# EAGLE board dbt_shield_v2_v30 (EAGLE 9.7.0)
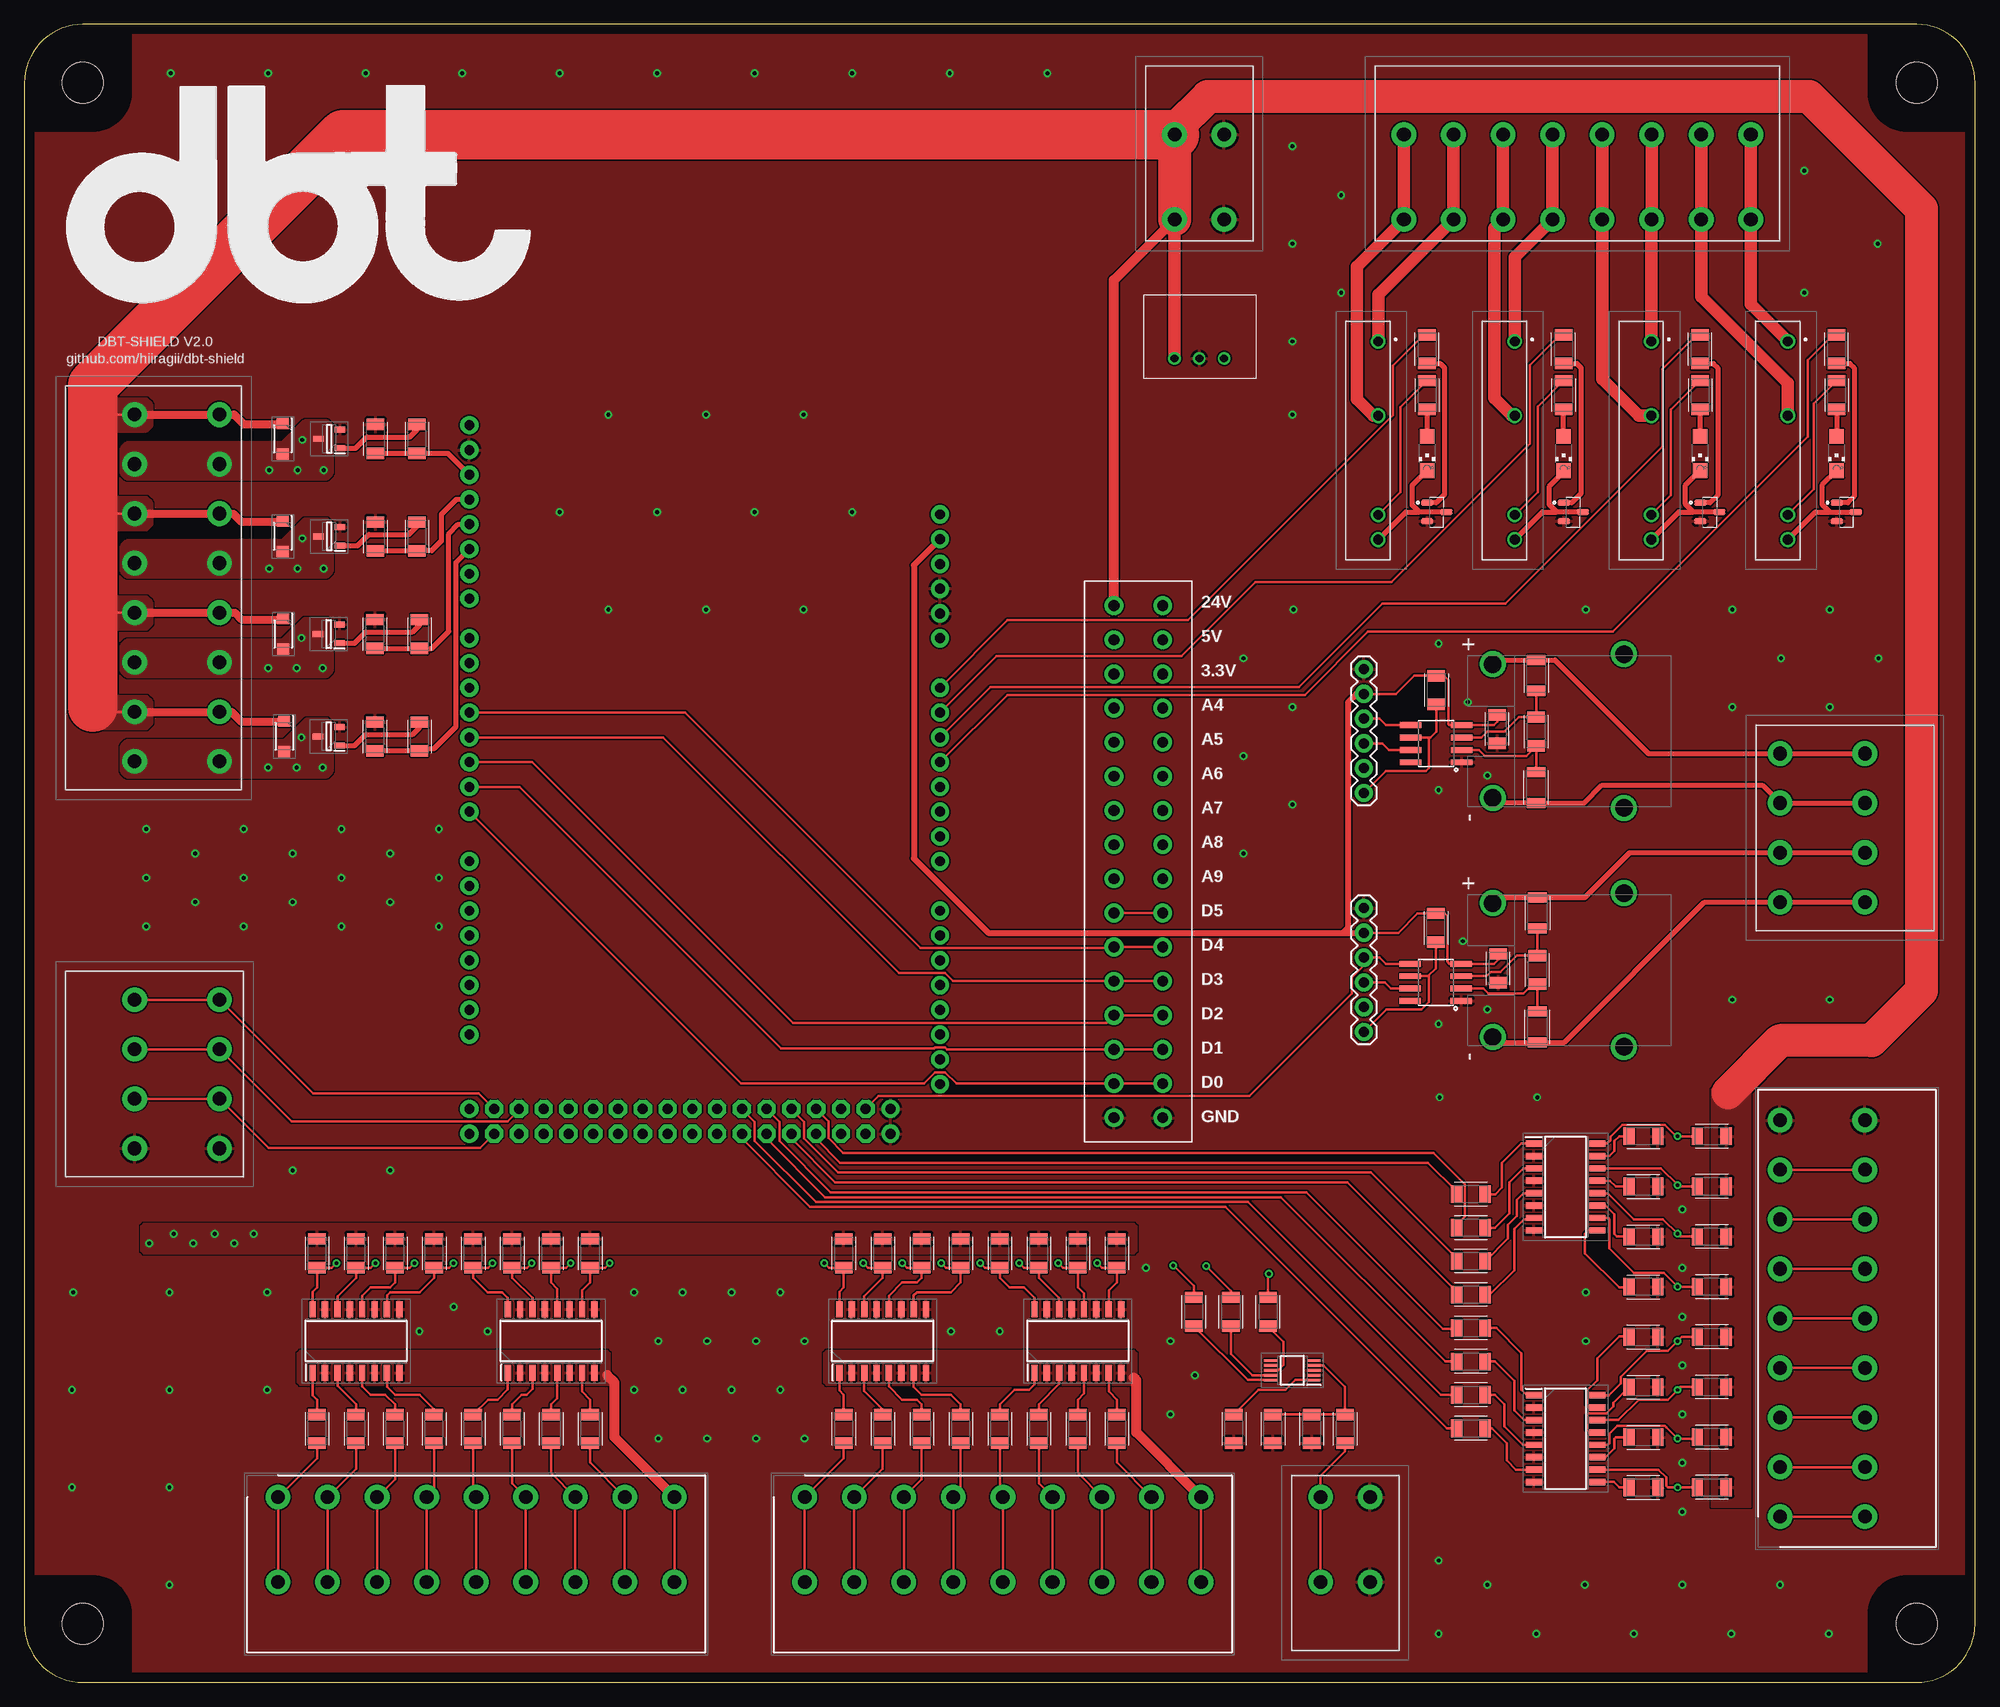
[diagram p0: board, top side]
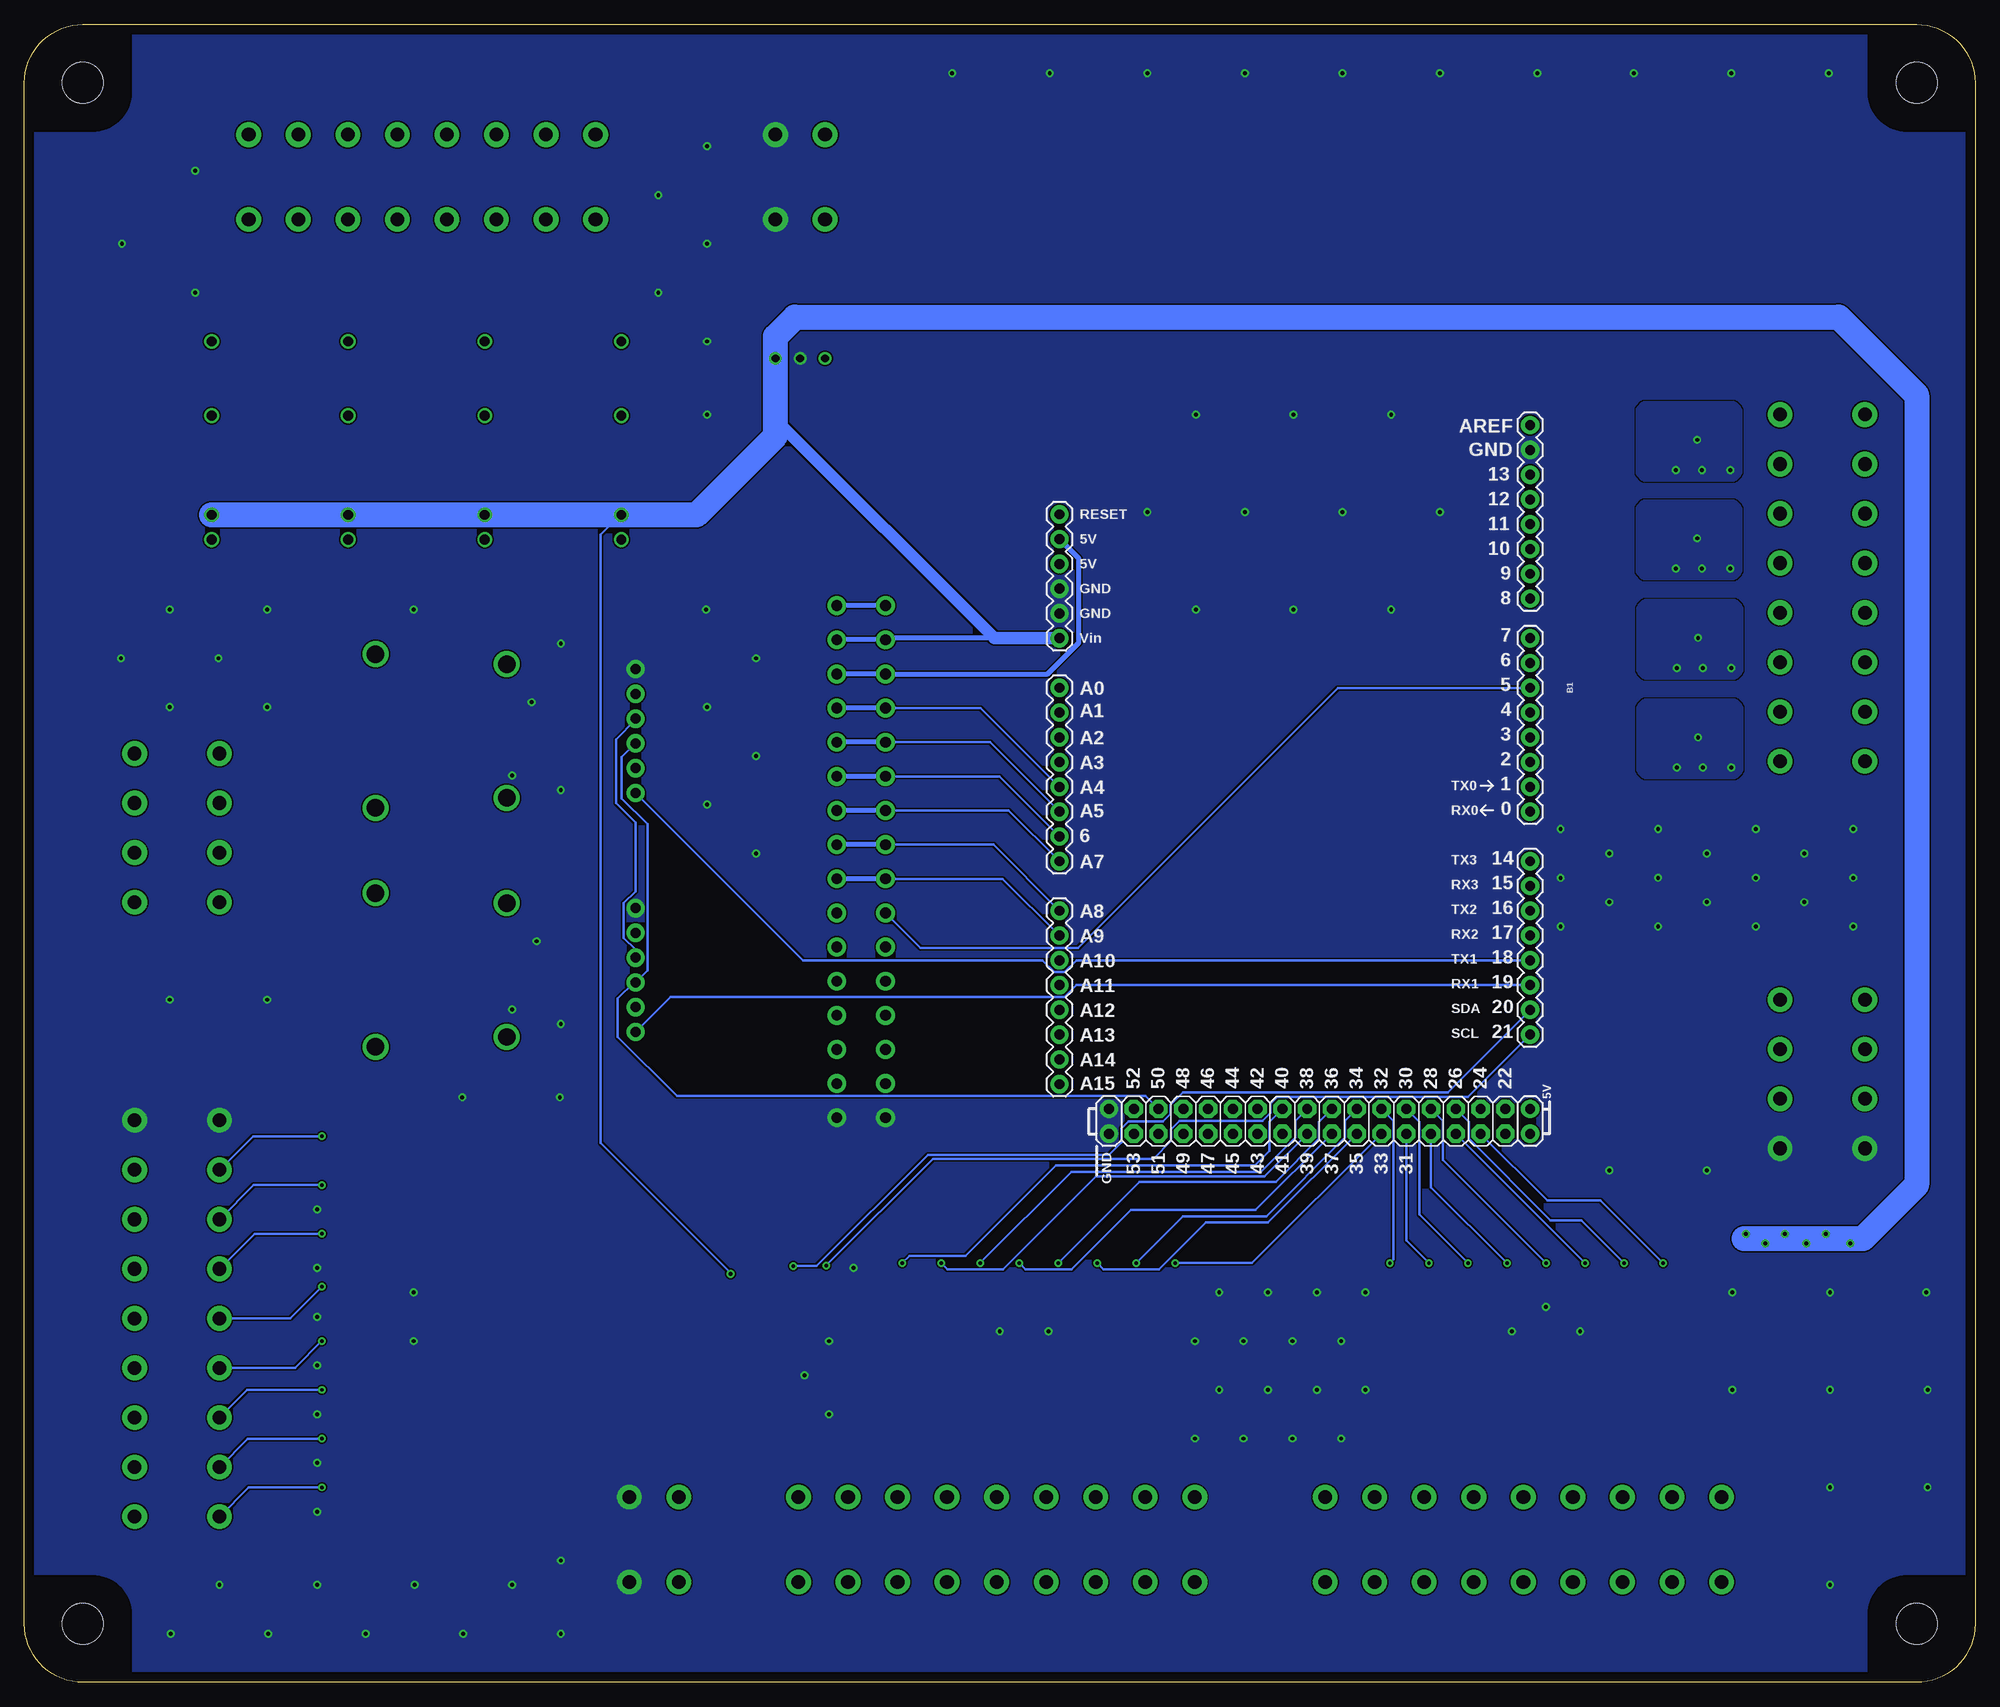
[diagram p1: board, bottom side, seen from below]

Size 200 x 170 mm. Coordinates in mm from the lower left corner, seen from the top.
Outline: 0,164 0,6 arc90 6,0 194,0 arc90 200,6 200,164 arc90 194,170 6,170 arc90 0,164
Copper layers (1*16): Top 0.035mm / dielectric 1.5mm / Bottom 0.035mm
Design rules "default": minimum track width 6mil, minimum drill 0.35mm, track to track 6mil, track to pad 6mil, pad to pad 6mil, via to via 6mil, smd to smd 6mil, copper to edge 40mil, drill to drill 6mil, minimum pad ring 10mil, minimum via ring 8mil, stop-mask expansion 4mil, vias tented up to drill 0mil, thermal gap 10mil
Holes 4.2 mm at 6,164 194,164 194,6 6,6
tRestrict: area -5,159 to 11,175; area 189,159 to 205,175; area -5,-5 to 11,11; area 189,-5 to 205,11
bRestrict: area -5,159 to 11,175; area 189,159 to 205,175; area -5,-5 to 11,11; area 189,-5 to 205,11

## Footprints (pad centres in the part's own frame; a part is rotated, then mirrored left to right if it is on the bottom)
ARDUINO_MEGA = drill 1.016 pad 1.88: 0 13.97,24.13; 1 11.43,24.13; 2 8.89,24.13; 3 6.35,24.13; 3.3V -13.97,-24.13; 4 3.81,24.13; 5 1.27,24.13; 5V@0 -11.43,-24.13; 5V@1 44.45,24.13; 5V@2 46.99,24.13; 6 -1.27,24.13; 7 -3.81,24.13; 8 -7.874,24.13; 9 -10.414,24.13; 10 -12.954,24.13; 11 -15.494,24.13; 12 -18.034,24.13; 13 -20.574,24.13; 14 19.05,24.13; 15 21.59,24.13; 16 24.13,24.13; 17 26.67,24.13; 18 29.21,24.13; 19 31.75,24.13; 20 34.29,24.13; 21 36.83,24.13; A0 1.27,-24.13; A1 3.81,-24.13; A2 6.35,-24.13; A3 8.89,-24.13; A4 11.43,-24.13; A5 13.97,-24.13; A6 16.51,-24.13; A7 19.05,-24.13; A8 24.13,-24.13; A9 26.67,-24.13; A10 29.21,-24.13; A11 31.75,-24.13; A12 34.29,-24.13; A13 36.83,-24.13; A14 39.37,-24.13; A15 41.91,-24.13; AREF -25.654,24.13; GND@0 -8.89,-24.13; GND@1 -6.35,-24.13; GND@2 44.45,-19.05; GND@3 46.99,-19.05; GND@4 -23.114,24.13; RESET -16.51,-24.13; VIN -3.81,-24.13 | drill 1.016 pad 1.88 octagon: 22 44.45,21.59; 23 46.99,21.59; 24 44.45,19.05; 25 46.99,19.05; 26 44.45,16.51; 27 46.99,16.51; 28 44.45,13.97; 29 46.99,13.97; 30 44.45,11.43; 31 46.99,11.43; 32 44.45,8.89; 33 46.99,8.89; 34 44.45,6.35; 35 46.99,6.35; 36 44.45,3.81; 37 46.99,3.81; 38 44.45,1.27; 39 46.99,1.27; 40 44.45,-1.27; 41 46.99,-1.27; 42 44.45,-3.81; 43 46.99,-3.81; 44 44.45,-6.35; 45 46.99,-6.35; 46 44.45,-8.89; 47 46.99,-8.89; 48 44.45,-11.43; 49 46.99,-11.43; 50 44.45,-13.97; 51 46.99,-13.97; 52 44.45,-16.51; 53 46.99,-16.51
CAPC3216X135 = smd 1.165 x 1.815: 1 -1.475,0; 2 1.475,0
SODFL3618X143N = smd 1.12 x 1.22: 1 -1.55,0; 2 1.55,0
SOIC127P700X230-16N = smd 1.65 x 0.65: 1 -3.25,4.445; 2 -3.25,3.175; 3 -3.25,1.905; 4 -3.25,0.635; 5 -3.25,-0.635; 6 -3.25,-1.905; 7 -3.25,-3.175; 8 -3.25,-4.445; 9 3.25,-4.445; 10 3.25,-3.175; 11 3.25,-1.905; 12 3.25,-0.635; 13 3.25,0.635; 14 3.25,1.905; 15 3.25,3.175; 16 3.25,4.445
SOP50P490X110-10N = smd 1.4 x 0.3: 1 -2.2,1; 2 -2.2,0.5; 3 -2.2,0; 4 -2.2,-0.5; 5 -2.2,-1; 6 2.2,-1; 7 2.2,-0.5; 8 2.2,0; 9 2.2,0.5; 10 2.2,1
1017503 = drill 1.4 pad 2.54: 1 0,0; 2 0,-8.7; 3 5.08,0; 4 5.08,-8.7
1017505 = drill 1.4 pad 2.54: 1 0,0; 2 0,-8.7; 3 5.08,0; 4 5.08,-8.7; 5 10.16,0; 6 10.16,-8.7; 7 15.24,0; 8 15.24,-8.7
1017509 = drill 1.4 pad 2.54: 1 0,0; 2 0,-8.7; 3 5.08,0; 4 5.08,-8.7; 5 10.16,0; 6 10.16,-8.7; 7 15.24,0; 8 15.24,-8.7; 9 20.32,0; 10 20.32,-8.7; 11 25.4,0; 12 25.4,-8.7; 13 30.48,0; 14 30.48,-8.7; 15 35.56,0; 16 35.56,-8.7
SHDR18W120P870X508_2X9_4652X18 = drill 1.4 pad 2.54: 1 0,0; 2 0,-8.7; 3 5.08,0; 4 5.08,-8.7; 5 10.16,0; 6 10.16,-8.7; 7 15.24,0; 8 15.24,-8.7; 9 20.32,0; 10 20.32,-8.7; 11 25.4,0; 12 25.4,-8.7; 13 30.48,0; 14 30.48,-8.7; 15 35.56,0; 16 35.56,-8.7; 17 40.64,0; 18 40.64,-8.7
1X06 = drill 1.016 pad 1.88: 1 0,0; 2 2.54,0; 3 5.08,0; 4 7.62,0; 5 10.16,0; 6 12.7,0
PCC-SMP = drill 1.778: + 6.858,0; - -6.858,0; CLIP1 -7.874,-13.462; CLIP2 7.874,-13.462
G3MC202PLDC5 = drill 1 pad 1.5: 1 0,0; 2 -7.62,0; 3 -17.78,0; 4 -20.32,0
INDC3216X190 = smd 1.043 x 1.91: 1 -1.584,0; 2 1.584,0
CHIPLED_1206 = smd 1.5 x 1.5: A 0,-1.75; C 0,1.75
SOT95P230X110-3N = smd 1.05 x 0.6: 1 -1.1,0.95; 2 -1.1,-0.95; 3 1.1,0
SOT95P230X110-3N1 = smd 1.26 x 0.61: B -0.98,0.95; C 0.98,0; E -0.98,-0.95
RESC3216X70 = smd 1.165 x 1.815: 1 -1.475,0; 2 1.475,0
DC-DC_CONVERTER_78XX = drill 0.8: GND 0,0; VIN -2.54,0; VOUT 2.54,0
SOIC8 = smd 0.61 x 2.21: 1 -1.905,-2.616; 2 -0.635,-2.616; 3 0.635,-2.616; 4 1.905,-2.616; 5 1.905,2.616; 6 0.635,2.616; 7 -0.635,2.616; 8 -1.905,2.616
1861991 = drill 1.1 pad 1.93: P$1 0,0; P$2 3.5,0; P$3 7,0; P$4 10.5,0; P$5 14,0; P$6 17.5,0; P$7 21,0; P$8 24.5,0; P$9 28,0; P$10 31.5,0; P$11 35,0; P$12 38.5,0; P$13 42,0; P$14 45.5,0; P$15 49,0; P$16 52.5,0; P$17 0,5; P$18 3.5,5; P$19 7,5; P$20 10.5,5; P$21 14,5; P$22 17.5,5; P$23 21,5; P$24 24.5,5; P$25 28,5; P$26 31.5,5; P$27 35,5; P$28 38.5,5; P$29 42,5; P$30 45.5,5; P$31 49,5; P$32 52.5,5

## Placement (x,y rotation side)
B1  ARDUINO_MEGA_R3FULL  [ARDUINO_MEGA]  69.75,103.25 270 bottom
C1  0.1uF  [CAPC3216X135]  151.1,73.21 270 top
C2  10 nF  [CAPC3216X135]  155.12,73.05 270 top
C3  0.1uF  [CAPC3216X135]  151,97.75 270 top
C4  10 nF  [CAPC3216X135]  155,97.5 270 top
C5  0.1uF  [CAPC3216X135]  127.5,38 270 top
C6  100pF  [CAPC3216X135]  132,26 270 top
D1  ES1ALHR3  [SODFL3618X143N]  26.5,127.5 270 top
D2  ES1ALHR3  [SODFL3618X143N]  26.5,117.5 270 top
D3  ES1ALHR3  [SODFL3618X143N]  26.55,107.5 270 top
D4  ES1ALHR3  [SODFL3618X143N]  26.65,97 270 top
IC1  TLP292-4_V4-LA,E  [SOIC127P700X230-16N]  34,35 90 top
IC2  TLP292-4_V4-LA,E  [SOIC127P700X230-16N]  54,35 90 top
IC3  TLP292-4_V4-LA,E  [SOIC127P700X230-16N]  88,35 90 top
IC4  TLP292-4_V4-LA,E  [SOIC127P700X230-16N]  108,35 90 top
IC5  TLP292-4_V4-LA,E  [SOIC127P700X230-16N]  158,25 0 top
IC6  TLP292-4_V4-LA,E  [SOIC127P700X230-16N]  158,50.8 0 top
IC7  ADS1015BQDGSRQ1  [SOP50P490X110-10N]  130,32 180 top
J1  1017503  [1017503]  123,150 180 top
J2  1017505  [1017505]  20,70 270 top
J3  1017509  [1017509]  20,130 270 top
J4  1017509  [1017509]  177,150 180 top
J5  1017505  [1017505]  180,80 90 top
J6  1017510  [SHDR18W120P870X508_2X9_4652X18]  26,19 0 top
J7  1017510  [SHDR18W120P870X508_2X9_4652X18]  80,19 0 top
J8  1017510  [SHDR18W120P870X508_2X9_4652X18]  180,17 90 top
J9  1017503  [1017503]  132.89,19 0 top
JP1  DNP  [1X06]  137.34,79.4 270 top
JP2  PCB_THERMOCOUPLE  [PCC-SMP]  150.55,73.05 90 top
JP3  DNP  [1X06]  137.34,103.9 270 top
JP4  PCB_THERMOCOUPLE  [PCC-SMP]  150.55,97.55 90 top
K1  G3MC-202PL-DC5  [G3MC202PLDC5]  180.8,137.5 90 top
K2  G3MC-202PL-DC5  [G3MC202PLDC5]  166.8,137.5 90 top
K3  G3MC-202PL-DC5  [G3MC202PLDC5]  152.8,137.5 90 top
K4  G3MC-202PL-DC5  [G3MC202PLDC5]  138.8,137.5 90 top
L1  470 OHM  [INDC3216X190]  155.12,67.2 270 top
L2  470 OHM  [INDC3216X190]  155.12,78.89 90 top
L3  470 OHM  [INDC3216X190]  155,91.75 270 top
L4  470 OHM  [INDC3216X190]  155,103.25 90 top
LED1  [CHIPLED_1206]  185.8,126 180 top
LED2  [CHIPLED_1206]  171.8,126 180 top
LED3  [CHIPLED_1206]  157.8,126 180 top
LED4  [CHIPLED_1206]  143.8,126 180 top
Q1  PMV40UN2R  [SOT95P230X110-3N]  31.25,127.5 180 top
Q2  PMV40UN2R  [SOT95P230X110-3N]  31.25,117.5 180 top
Q3  PMV40UN2R  [SOT95P230X110-3N]  31.2,107.5 180 top
Q4  PMV40UN2R  [SOT95P230X110-3N]  31.2,97 180 top
Q5  MMBT3904-7-F  [SOT95P230X110-3N1]  186.8,120 0 top
Q6  MMBT3904-7-F  [SOT95P230X110-3N1]  172.8,120 0 top
Q7  MMBT3904-7-F  [SOT95P230X110-3N1]  158.8,120 0 top
Q8  MMBT3904-7-F  [SOT95P230X110-3N1]  144.8,120 0 top
R1  6.8k  [RESC3216X70]  30,26 90 top
R2  6.8k  [RESC3216X70]  34,26 90 top
R3  6.8k  [RESC3216X70]  38,26 90 top
R4  6.8k  [RESC3216X70]  42,26 90 top
R5  10k  [RESC3216X70]  30,44 90 top
R6  10k  [RESC3216X70]  34,44 90 top
R7  10k  [RESC3216X70]  38,44 90 top
R8  10k  [RESC3216X70]  42,44 90 top
R9  6.8k  [RESC3216X70]  46,26 90 top
R10  6.8k  [RESC3216X70]  50,26 90 top
R11  6.8k  [RESC3216X70]  54,26 90 top
R12  6.8k  [RESC3216X70]  58,26 90 top
R13  10k  [RESC3216X70]  46,44 90 top
R14  10k  [RESC3216X70]  50,44 90 top
R15  10k  [RESC3216X70]  54,44 90 top
R16  10k  [RESC3216X70]  58,44 90 top
R17  6.8k  [RESC3216X70]  84,26 90 top
R18  6.8k  [RESC3216X70]  88,26 90 top
R19  6.8k  [RESC3216X70]  92,26 90 top
R20  6.8k  [RESC3216X70]  96,26 90 top
R21  10k  [RESC3216X70]  84,44 90 top
R22  10k  [RESC3216X70]  88,44 90 top
R23  10k  [RESC3216X70]  92,44 90 top
R24  10k  [RESC3216X70]  96,44 90 top
R25  6.8k  [RESC3216X70]  100,26 90 top
R26  6.8k  [RESC3216X70]  104,26 90 top
R27  6.8k  [RESC3216X70]  108,26 90 top
R28  6.8k  [RESC3216X70]  112,26 90 top
R29  10k  [RESC3216X70]  100,44 90 top
R30  10k  [RESC3216X70]  104,44 90 top
R31  10k  [RESC3216X70]  108,44 90 top
R32  10k  [RESC3216X70]  112,44 90 top
R33  250R  [RESC3216X70]  148.3,36.34 0 top
R34  250R  [RESC3216X70]  148.3,32.91 0 top
R35  250R  [RESC3216X70]  148.3,29.48 0 top
R36  250R  [RESC3216X70]  148.3,26.05 0 top
R37  10k  [RESC3216X70]  173,35.43 0 top
R38  10k  [RESC3216X70]  173,30.29 0 top
R39  10k  [RESC3216X70]  173,25.14 0 top
R40  10k  [RESC3216X70]  173,20 0 top
R41  250R  [RESC3216X70]  148.3,50.05 0 top
R42  250R  [RESC3216X70]  148.3,46.62 0 top
R43  250R  [RESC3216X70]  148.3,43.19 0 top
R44  250R  [RESC3216X70]  148.3,39.76 0 top
R45  10k  [RESC3216X70]  173,56 0 top
R46  10k  [RESC3216X70]  173,50.86 0 top
R47  10k  [RESC3216X70]  173,45.71 0 top
R48  10k  [RESC3216X70]  173,40.57 0 top
R49  10k  [RESC3216X70]  166,35.43 180 top
R50  10k  [RESC3216X70]  166,30.29 180 top
R51  10k  [RESC3216X70]  166,25.14 180 top
R52  10k  [RESC3216X70]  166,20 180 top
R53  10k  [RESC3216X70]  166,56 180 top
R54  10k  [RESC3216X70]  166,50.86 180 top
R55  10k  [RESC3216X70]  166,45.71 180 top
R56  10k  [RESC3216X70]  166,40.57 180 top
R57  10k  [RESC3216X70]  144.71,77.36 90 top
R58  10k  [RESC3216X70]  144.75,101.75 90 top
R59  10k  [RESC3216X70]  36,127.5 270 top
R60  1k  [RESC3216X70]  40.25,127.5 90 top
R61  10k  [RESC3216X70]  36,117.5 270 top
R62  1k  [RESC3216X70]  40.25,117.5 90 top
R63  10k  [RESC3216X70]  35.95,107.5 270 top
R64  1k  [RESC3216X70]  40.5,107.5 90 top
R65  10k  [RESC3216X70]  35.95,97 270 top
R66  1k  [RESC3216X70]  40.5,97 90 top
R67  10k  [RESC3216X70]  185.8,136.7 270 top
R68  250R  [RESC3216X70]  185.8,132 90 top
R69  10k  [RESC3216X70]  171.8,136.7 270 top
R70  250R  [RESC3216X70]  171.8,132 90 top
R71  10k  [RESC3216X70]  157.8,136.7 270 top
R72  250R  [RESC3216X70]  157.8,132 90 top
R73  10k  [RESC3216X70]  143.8,136.7 270 top
R74  250R  [RESC3216X70]  143.8,132 90 top
R75  6.8k  [RESC3216X70]  135.4,26 90 top
R76  6.8k  [RESC3216X70]  128,26 90 top
R77  10K  [RESC3216X70]  124,26 90 top
R78  6.8k  [RESC3216X70]  119.9,38 270 top
R79  6.8k  [RESC3216X70]  123.7,38 270 top
U1  R-78E5.0-1.0  [DC-DC_CONVERTER_78XX]  120.46,135.75 0 top
U2  MAX31855K  [SOIC8]  144.71,71.78 90 top
U3  MAX31855K  [SOIC8]  144.75,96.25 90 top
U$1  1861991  [1861991]  116.7,57.9 90 top

## Library data of the parts
B1 LED1-LED4 U$1 = dbt_shield
C1-C6 = Capacitor; CATEGORY: Capacitor
D1-D4 = dbt_shield; DESCRIPTION: Rectifiers 1A, 50V, SUPER FAST SM RECTIFIER; HEIGHT: 1.43mm; MANUFACTURER_NAME: Taiwan Semiconductor; MANUFACTURER_PART_NUMBER: ES1ALHR3; MOUSER_PART_NUMBER: 821-ES1ALHR3; MOUSER_PRICE-STOCK: https://www.mouser.co.uk/ProductDetail/Taiwan-Semiconductor/ES1ALHR3?qs=70cth9uAySfs%2F8RIhd19cA%3D%3D
IC1-IC6 = dbt_shield; DESCRIPTION: Transistor Output Optocouplers 4ch Transistor opto coupler; HEIGHT: 2.3mm; MANUFACTURER_NAME: Toshiba; MANUFACTURER_PART_NUMBER: TLP292-4(V4-LA,E; MOUSER_PART_NUMBER: 757-TLP292-4V4-LAE; MOUSER_PRICE-STOCK: https://www.mouser.com/Search/Refine.aspx?Keyword=757-TLP292-4V4-LAE
IC7 = ADS1015BQDGSRQ1; ARROW_PART_NUMBER: ADS1015BQDGSRQ1; ARROW_PRICE-STOCK: https://www.arrow.com/en/products/ads1015bqdgsrq1/texas-instruments; DESCRIPTION: Automotive 12-Bit 3.3kSPS 4-Ch Delta-Sigma ADC With PGA, Oscillator, VREF, Comparator, and I2C; HEIGHT: 1.1mm; MANUFACTURER_NAME: Texas Instruments; MANUFACTURER_PART_NUMBER: ADS1015BQDGSRQ1; MOUSER_PART_NUMBER: 595-ADS1015BQDGSRQ1; MOUSER_PRICE-STOCK: https://www.mouser.co.uk/ProductDetail/Texas-Instruments/ADS1015BQDGSRQ1?qs=34RfhUjJmKfZv563%2FD593g%3D%3D
J1 J9 = dbt_shield; ARROW_PART_NUMBER: 1017503; ARROW_PRICE-STOCK: https://www.arrow.com/en/products/1017503/phoenix-contact; DESCRIPTION: Phoenix Contact TDPT Series 5.08mm Pitch, PCB Terminal Block, PCB Mount, 2 Way; HEIGHT: 19.2mm; MANUFACTURER_NAME: Phoenix Contact; MANUFACTURER_PART_NUMBER: 1017503; MOUSER_PART_NUMBER: 651-1017503; MOUSER_PRICE-STOCK: https://www.mouser.co.uk/ProductDetail/Phoenix-Contact/1017503?qs=F5EMLAvA7ICurcWsoxF7Hw%3D%3D
J2 J5 = dbt_shield; ALLIED_NUMBER: 71241694; ALLIED_PRICE-STOCK: https://www.alliedelec.com/phoenixcontact-1017505/71241694/; DESCRIPTION: Phoenix Contact TDPT Series 5.08mm Pitch, PCB Terminal Block, PCB Mount, 4 Way; HEIGHT: 19.2mm; MANUFACTURER_NAME: Phoenix Contact; MANUFACTURER_PART_NUMBER: 1017505; MOUSER_PART_NUMBER: 651-1017505; MOUSER_PRICE-STOCK: https://www.mouser.com/Search/Refine.aspx?Keyword=651-1017505; RS_PART_NUMBER: 1753922; RS_PRICE-STOCK: http://uk.rs-online.com/web/p/products/1753922
J3 J4 = dbt_shield; ALLIED_NUMBER: 71241695; ALLIED_PRICE-STOCK: https://www.alliedelec.com/phoenixcontact-1017509/71241695/; DESCRIPTION: Phoenix Contact TDPT Series 5.08mm Pitch, PCB Terminal Block, PCB Mount, 8 Way; HEIGHT: 19.2mm; MANUFACTURER_NAME: Phoenix Contact; MANUFACTURER_PART_NUMBER: 1017509; MOUSER_PART_NUMBER: 651-1017509; MOUSER_PRICE-STOCK: https://www.mouser.com/Search/Refine.aspx?Keyword=651-1017509; RS_PART_NUMBER: 1753943P; RS_PRICE-STOCK: http://uk.rs-online.com/web/p/products/1753943P
J6-J8 = dbt_shield; ALLIED_NUMBER: 71241705; ALLIED_PRICE-STOCK: https://www.alliedelec.com/phoenixcontact-1017510/71241705/; DESCRIPTION: Phoenix Contact TDPT 2.5/ 9-SP-5.08, 9 Way PCB Terminal Block; HEIGHT: 19.2mm; MANUFACTURER_NAME: Phoenix Contact; MANUFACTURER_PART_NUMBER: 1017510; MOUSER_PART_NUMBER: 651-1017510; MOUSER_PRICE-STOCK: https://www.mouser.com/Search/Refine.aspx?Keyword=651-1017510; RS_PART_NUMBER: 1753946P; RS_PRICE-STOCK: http://uk.rs-online.com/web/p/products/1753946P
JP1 JP3 = SparkFun-Connectors; PROD_ID: CONN-08437
JP2 JP4 = Testing
K1-K4 = dbt_shield; DESCRIPTION: Solid State Relays - PCB Mount 5VDC/100-240VAC 2A Built-in snubber; HEIGHT: 20.5mm; MANUFACTURER_NAME: Omron Electronics; MANUFACTURER_PART_NUMBER: G3MC-202PL-DC5; MOUSER_PART_NUMBER: 653-G3MC-202PL-DC5; MOUSER_PRICE-STOCK: https://www.mouser.com/Search/Refine.aspx?Keyword=653-G3MC-202PL-DC5
L1-L4 = Inductor; CATEGORY: Inductor; PROD_ID: NDUC-12579; SUB-CATEGORY: Fixed
Q1-Q4 = dbt_shield; DESCRIPTION: MOSFET 30V N-channel Trench MOSFET; HEIGHT: 1.1mm; MANUFACTURER_NAME: Nexperia; MANUFACTURER_PART_NUMBER: PMV40UN2R; MOUSER_PART_NUMBER: 771-PMV40UN2R; MOUSER_PRICE-STOCK: https://www.mouser.co.uk/ProductDetail/Nexperia/PMV40UN2R?qs=sV%252BQJnSpgu%2Ftc99QGRzcMg%3D%3D; RS_PART_NUMBER: 1362196P; RS_PRICE-STOCK: http://uk.rs-online.com/web/p/products/1362196P
Q5-Q8 = dbt_shield; AVAILABILITY: Unavailable; DESCRIPTION: TRANS NPN 40V 0.2A SMD SOT23-3; MF: Diodes Inc.; MP: MMBT3904-7-F; PACKAGE: SOT-23 Diodes Inc.; PRICE: None
R1-R79 = Resistor; CATEGORY: Resistor; SUB-CATEGORY: Fixed
U1 = dbt_shield; PROD_ID: COM-13655
U2 U3 = SparkFun-AnalogIC; PROD_ID: IC-12578

## Nets
1LINE+: J4.1 J4.2 K1.1
1LINE-: J4.3 J4.4 K1.2
2LINE+: J4.5 J4.6 K2.1
2LINE-: J4.7 J4.8 K2.2
3LINE+: J4.9 J4.10 K3.1
3LINE-: J4.11 J4.12 K3.2
3V3: B1.3.3V C1.1 C3.1 JP1.2 JP3.2 R57.2 R58.2 U2.4 U3.4 U$1.P$14 U$1.P$30
4LINE+: J4.13 J4.14 K4.1
4LINE-: J4.15 J4.16 K4.2
5V: B1.VIN C5.1 K1.3 K2.3 K3.3 K4.3 R5.2 R6.2 R7.2 R8.2 R13.2 R14.2 R15.2 R16.2 R21.2 R22.2 R23.2 R24.2 R29.2 R30.2 R31.2 R32.2 R68.2 R70.2 R72.2 R74.2 U1.VOUT U$1.P$15 U$1.P$31
24V: D1.1 D2.1 D3.1 D4.1 J1.3 J1.4 J3.1 J3.2 J3.5 J3.6 J3.9 J3.10 J3.13 J3.14 R37.2 R38.2 R39.2 R40.2 R45.2 R46.2 R47.2 R48.2 U1.VIN U$1.P$16 U$1.P$32
A0: B1.A0 R73.1
A1: B1.A1 R71.1
A2: B1.A2 R69.1
A3: B1.A3 R67.1
A4: B1.A4 U$1.P$13 U$1.P$29
A5: B1.A5 U$1.P$12 U$1.P$28
A6: B1.A6 U$1.P$11 U$1.P$27
A7: B1.A7 U$1.P$10 U$1.P$26
A8: B1.A8 U$1.P$9 U$1.P$25
A9: B1.A9 U$1.P$8 U$1.P$24
AIN: J9.1 J9.2 R75.1
DI0: B1.25 IC1.16 R5.1
DI1: B1.26 IC1.14 R6.1
DI2: B1.27 IC1.12 R7.1
DI3: B1.28 IC1.10 R8.1
DI4: B1.29 IC2.16 R13.1
DI5: B1.30 IC2.14 R14.1
DI6: B1.31 IC2.12 R15.1
DI7: B1.32 IC2.10 R16.1
DI8: B1.33 IC3.16 R21.1
DI9: B1.34 IC3.14 R22.1
DI10: B1.35 IC3.12 R23.1
DI11: B1.36 IC3.10 R24.1
DI12: B1.37 IC4.16 R29.1
DI13: B1.38 IC4.14 R30.1
DI14: B1.39 IC4.12 R31.1
DI15: B1.40 IC4.10 R32.1
DIR: B1.24 J2.3 J2.4
DO0: B1.44 R33.1
DO1: B1.45 R34.1
DO2: B1.42 R35.1
DO3: B1.43 R36.1
DO4: B1.49 R41.1
DO5: B1.48 R42.1
DO6: B1.46 R43.1
DO7: B1.47 R44.1
ENBL: B1.23 J2.5 J2.6
GND: B1.GND@0 B1.GND@1 B1.GND@2 B1.GND@3 B1.GND@4 C1.2 C3.2 C6.2 IC1.9 IC1.11 IC1.13 IC1.15 IC2.9 IC2.11 IC2.13 IC2.15 IC3.9 IC3.11 IC3.13 IC3.15 IC4.9 IC4.11 IC4.13 IC4.15 IC5.2 IC5.4 IC5.6 IC5.8 IC6.2 IC6.4 IC6.6 IC6.8 IC7.3 J1.1 J1.2 J2.7 J2.8 J8.17 J8.18 J9.3 J9.4 JP1.1 JP3.1 Q1.2 Q2.2 Q3.2 Q4.2 Q5.E Q6.E Q7.E Q8.E R49.1 R50.1 R51.1 R52.1 R53.1 R54.1 R55.1 R56.1 R59.1 R61.1 R63.1 R65.1 R76.1 R77.1 U1.GND U2.1 U3.1 U$1.P$1 U$1.P$17
MISO: B1.50 JP1.4 JP3.4 U2.7 U3.7
MOSI: B1.51
MS0-: D1.2 J3.3 J3.4 Q1.3
MS1-: D2.2 J3.7 J3.8 Q2.3
MS2-: D3.2 J3.11 J3.12 Q3.3
MS3-: D4.2 J3.15 J3.16 Q4.3
N$1: IC1.1 R1.2
N$2: IC1.3 R2.2
N$3: IC1.5 R3.2
N$4: IC1.7 R4.2
N$5: IC2.1 R9.2
N$6: IC2.3 R10.2
N$7: IC2.5 R11.2
N$8: IC2.7 R12.2
N$9: IC3.1 R17.2
N$10: IC3.3 R18.2
N$11: IC3.5 R19.2
N$12: IC3.7 R20.2
N$13: IC4.1 R25.2
N$14: IC4.3 R26.2
N$15: IC4.5 R27.2
N$16: IC4.7 R28.2
N$17: IC5.1 R33.2
N$18: IC5.3 R34.2
N$19: IC5.5 R35.2
N$20: IC5.7 R36.2
N$21: IC6.1 R41.2
N$22: IC6.3 R42.2
N$23: IC6.5 R43.2
N$24: IC6.7 R44.2
N$25: IC5.15 R49.2
N$26: IC5.13 R50.2
N$27: IC5.11 R51.2
N$28: IC5.9 R52.2
N$29: IC6.15 R53.2
N$30: IC6.13 R54.2
N$31: IC6.11 R55.2
N$32: IC6.9 R56.2
N$35: C2.1 L2.1 U2.3
N$36: C4.1 L4.1 U3.3
N$37: C4.2 L3.1 U3.2
N$38: Q1.1 R60.2
N$39: C2.2 L1.1 U2.2
N$40: Q2.1 R62.2
N$41: Q3.1 R64.2
N$42: Q4.1 R66.2
N$43: LED1.A R68.1
N$44: K1.4 LED1.C Q5.C
N$45: Q5.B R67.2
N$46: LED2.A R70.1
N$47: C6.1 IC7.4 R75.2 R76.2
N$48: K2.4 LED2.C Q6.C
N$49: Q6.B R69.2
N$50: LED3.A R72.1
N$51: K3.4 LED3.C Q7.C
N$52: Q7.B R71.2
N$53: LED4.A R74.1
N$54: K4.4 LED4.C Q8.C
N$55: Q8.B R73.2
N$56: IC7.1 R77.2
N$58: C5.2 IC7.8
N$59: IC7.9 R79.2
N$60: IC7.10 R78.2
PLC_COM1: IC1.2 IC1.4 IC1.6 IC1.8 IC2.2 IC2.4 IC2.6 IC2.8 J6.17 J6.18
PLC_COM2: IC3.2 IC3.4 IC3.6 IC3.8 IC4.2 IC4.4 IC4.6 IC4.8 J7.17 J7.18
PLC_DI0: J6.1 J6.2 R1.1
PLC_DI1: J6.3 J6.4 R2.1
PLC_DI2: J6.5 J6.6 R3.1
PLC_DI3: J6.7 J6.8 R4.1
PLC_DI4: J6.9 J6.10 R9.1
PLC_DI5: J6.11 J6.12 R10.1
PLC_DI6: J6.13 J6.14 R11.1
PLC_DI7: J6.15 J6.16 R12.1
PLC_DI8: J7.1 J7.2 R17.1
PLC_DI9: J7.3 J7.4 R18.1
PLC_DI10: J7.5 J7.6 R19.1
PLC_DI11: J7.7 J7.8 R20.1
PLC_DI12: J7.9 J7.10 R25.1
PLC_DI13: J7.11 J7.12 R26.1
PLC_DI14: J7.13 J7.14 R27.1
PLC_DI15: J7.15 J7.16 R28.1
PLC_DO0: IC5.16 J8.7 J8.8 R37.1
PLC_DO1: IC5.14 J8.5 J8.6 R38.1
PLC_DO2: IC5.12 J8.3 J8.4 R39.1
PLC_DO3: IC5.10 J8.1 J8.2 R40.1
PLC_DO4: IC6.16 J8.15 J8.16 R45.1
PLC_DO5: IC6.14 J8.13 J8.14 R46.1
PLC_DO6: IC6.12 J8.11 J8.12 R47.1
PLC_DO7: IC6.10 J8.9 J8.10 R48.1
PWM0: B1.0 U$1.P$2 U$1.P$18
PWM1: B1.1 U$1.P$3 U$1.P$19
PWM2: B1.2 U$1.P$4 U$1.P$20
PWM3: B1.3 U$1.P$5 U$1.P$21
PWM4: B1.4 U$1.P$6 U$1.P$22
PWM5: B1.5 U$1.P$7 U$1.P$23
PWM10: B1.10 R65.2 R66.1
PWM11: B1.11 R63.2 R64.1
PWM12: B1.12 R61.2 R62.1
PWM13: B1.13 R59.2 R60.1
SCK: B1.52 JP1.3 JP3.3 U2.5 U3.5
SCL: B1.21 R78.1
SDA: B1.20 R79.1
SS: B1.53
STEP: B1.22 J2.1 J2.2
T1+: J5.3 J5.4 JP2.+ L2.2
T1-: J5.1 J5.2 JP2.- L1.2
T1_CS: B1.19 JP1.6 R57.1 U2.6
T2+: J5.7 J5.8 JP4.+ L4.2
T2-: J5.5 J5.6 JP4.- L3.2
T2_CS: B1.18 JP3.6 R58.1 U3.6

## Tracks (layer width: path | path; a pad name or v marks a point on that pad's centre or on a via)
1LINE+
  Top 1.27: J4.2 J4.1 177,141.3 K1.1
1LINE-
  Top 1.27: J4.4 J4.3 171.92,142.08 180.8,133.2 K1.2
2LINE+
  Top 1.27: J4.6 J4.5 166.8,149.96 K2.1
2LINE-
  Top 1.27: J4.8 J4.7 161.76,133.64 165.52,129.88 K2.2
3LINE+
  Top 1.27: J4.10 J4.9 152.8,146.12 K3.1
3LINE-
  Top 1.27: J4.12 J4.11 150.7,149.1 150.7,131.7 152.52,129.88 K3.2
3V3
  Top 0.254: C1.1 151.1,74.1 150.68,73.68 U2.4 146.12,73.68 145.89,73.91 145.89,78.61 145.66,78.84 R57.2 142.84,78.84 140.86,76.86 JP1.2 | JP3.2 140.61,101.36 142.5,103.25 144.72,103.25 R58.2 145.53,103.22 146,102.75 146,98.25 146.09,98.16 U3.4 150.66,98.16 151,98.5 C3.1
  Top 0.61: B1.3.3V 91.2,114.54 91.2,84.5 98.84,76.86 135.2,76.86 | 135.2,76.86 JP1.2 | JP3.2 136.56,101.36 135.7,100.5 135.7,77.36 135.2,76.86
  Bottom 0.508: U$1.P$14 U$1.P$30 95.1,103.4 91.9,106.6 91.9,115.24 B1.3.3V
4LINE+
  Top 1.27: J4.14 J4.13 138.8,142.28 K4.1
4LINE-
  Top 1.27: J4.16 J4.15 136.6,145.16 136.6,131.6 138.32,129.88 K4.2
5V  (via drill 0.4)
  Top 0.254: C5.1 127.5,41.8 v127.6,41.9 | R74.2 141.1,130.78 141.1,122.02 K4.3 | R72.2 155.15,130.82 155.15,122.03 152.84,119.72 K3.3 | R70.2 168.82,130.5 168.82,121.75 K2.3 | R68.2 183.45,131.12 183.45,122.37 K1.3
  Bottom 0.254: v127.6,41.9 127.6,42 140.9,55.3 140.9,117.7 138.9,119.7 | K4.3 138.78,119.7 136.25,119.7 | K3.3 152.78,119.7 151,119.7 | K2.3 166.78,119.7 164.85,119.7 | K1.3 181.28,119.72 181.65,119.35 | v23.5,46 23.7,45.8 23.7,45.5
  Bottom 0.508: U$1.P$15 U$1.P$31 111.54,107.06 B1.VIN
  Bottom 1.27: B1.VIN 100.56,107.06 123,129.5 U1.VOUT
  Bottom 2.54: K1.3 180.78,119.7 164.85,119.7 151,119.7 138.9,119.7 136.25,119.7 131.1,119.7 123,127.8 U1.VOUT 123,138 121,140 14,140 6,132 6,51 11.5,45.5 23.7,45.5
  other vias: 12.8,45 15.3,46 17.3,45 19.5,46 21.5,45
  pour Top: 114,44.25 114,46.75 113.75,47 12.25,47 12,46.75 12,44.25 12.25,44 113.75,44
24V
  Top 0.254: J3.14 7.48,99.52 7,100 | J3.10 7.12,109.68 7,109.8 | J3.6 7.04,119.84 7,119.8 | J3.2 7,130
  Top 0.813: J3.2 J3.1 21.5,130 22.5,129 26.45,129 D1.1 | J3.6 J3.5 21.41,119.84 22.25,119 26.45,119 D2.1 | J3.10 J3.9 21.57,109.68 22.25,109 26.5,109 D3.1 | J3.14 J3.13 21.23,99.52 22.25,98.5 26.6,98.5 D4.1
  Top 1.016: U$1.P$32 111.7,143.78 J1.3
  Top 1.27: J1.3 U1.VIN
  Top 3.4: 174.68,60.48 180,65.8 189.4,65.8 194.5,70.9 194.5,151.1 183,162.6 121.32,162.6 117.92,159.2 J1.4 J1.3
  Top 5.08: J1.4 32.7,158.7 7,133 7,130 7,119.8 7,109.8 7,100
  Bottom 0.508: U$1.P$32 U$1.P$16
  pour Top: 173,60.8 173,18 176.95,18 176.95,60.8
  pour Top (no thermals): 6.5,128.4 12.5,128.4 13,128.9 13,131 12.5,131.5 6.5,131.5
  pour Top (no thermals): 6.5,118.3 12.5,118.3 13,118.8 13,120.9 12.5,121.4 6.5,121.4
  pour Top (no thermals): 6.5,108.1 12.5,108.1 13,108.6 13,110.7 12.5,111.2 6.5,111.2
  pour Top (no thermals): 6.5,97.9 12.5,97.9 13,98.4 13,100.5 12.5,101 6.5,101
A0
  Top 0.254: B1.A0 100.81,108.91 119.29,108.91 140.32,129.94 140.32,135.02 143.47,138.18 R73.1
A1
  Top 0.254: B1.A1 99.69,105.25 118.65,105.25 126.22,112.82 140.15,112.82 154.34,127.02 154.34,135.04 157.47,138.18 R71.1
A2
  Top 0.254: B1.A2 99.03,102.05 130.65,102.05 139.23,110.63 151.85,110.63 167.93,126.71 167.93,134.63 171.47,138.18 R69.1
A3
  Top 0.254: B1.A3 100.77,101.25 131.28,101.25 137.76,107.73 162.85,107.73 182.86,127.74 182.86,135.56 185.47,138.18 R67.1
A4
  Bottom 0.254: B1.A4 101.96,99.9 U$1.P$29
  Bottom 0.508: U$1.P$29 U$1.P$13
A5
  Bottom 0.254: B1.A5 101,96.4 U$1.P$28
  Bottom 0.508: U$1.P$28 U$1.P$12
A6
  Bottom 0.254: B1.A6 100.04,92.9 U$1.P$27
  Bottom 0.508: U$1.P$27 U$1.P$11
A7
  Bottom 0.254: B1.A7 99.08,89.4 U$1.P$26
  Bottom 0.508: U$1.P$26 U$1.P$10
A8
  Bottom 0.254: B1.A8 100.66,85.9 U$1.P$25
  Bottom 0.508: U$1.P$25 U$1.P$9
A9
  Bottom 0.254: B1.A9 99.7,82.4 U$1.P$24
  Bottom 0.508: U$1.P$24 U$1.P$8
AIN
  Top 0.254: J9.2 J9.1 132.89,21.19 135.4,23.7 R75.1
DI0  (via drill 0.35)
  Top 0.254: IC1.16 29.55,40.05 30,40.5 R5.1 31.52,42.52 v32,43
  Bottom 0.254: B1.25 43.84,49.4 38.4,49.4 v32,43
DI1  (via drill 0.35)
  Top 0.254: IC1.14 32.09,39.59 34,41.5 R6.1 35.52,42.52 v36,43
  Bottom 0.254: B1.26 51.92,57.48 51.92,55.76 43.53,47.36 40.36,47.36 v36,43
DI2  (via drill 0.35)
  Top 0.254: IC1.12 34.63,39.63 35.5,40.5 37.5,40.5 38,41 R7.1 39.52,42.52 v40,43
  Bottom 0.254: B1.27 53.24,56.24 v40,43
DI3  (via drill 0.35)
  Top 0.254: IC1.10 37.17,39.67 37.5,40 40.5,40 42,41.5 R8.1 43.52,42.52 v44,43
  Bottom 0.254: B1.28 54.56,57.58 54.56,53.56 v44,43
DI4  (via drill 0.35)
  Top 0.254: IC2.16 49.55,39.45 49,40 47.5,40 46,41.5 R13.1 47.52,42.52 v48,43
  Bottom 0.254: B1.29 55.78,50.78 v48,43
DI5  (via drill 0.35)
  Top 0.254: IC2.14 52.09,39.41 50,41.5 R14.1 51.52,42.52 v52,43
  Bottom 0.254: B1.30 57,57.48 57,48 v52,43
DI6  (via drill 0.35)
  Top 0.254: IC2.12 54.63,40.37 54,41 R15.1 55.52,42.52 v56,43
  Bottom 0.254: B1.31 58.32,45.32 v56,43
DI7  (via drill 0.35)
  Top 0.254: IC2.10 57.17,40.17 58,41 R16.1 59.52,42.52 v60,43
  Bottom 0.254: B1.32 59.64,57.58 59.64,43.36 v60,43
DI8  (via drill 0.35)
  Top 0.254: IC3.16 83.56,40.05 84,40.5 R21.1 82.47,42.52 v82,43
  Bottom 0.254: v82,43 74.12,43 B1.33
DI9  (via drill 0.35)
  Top 0.254: IC3.14 86.09,39.59 88,41.5 R22.1 86.47,42.52 v86,43
  Bottom 0.254: v86,43 81.2,47.8 72.68,47.8 64.62,55.86 64.62,57.58 B1.34
DI10  (via drill 0.35)
  Top 0.254: IC3.12 88.64,39.63 90,41 91.5,41 92,41.5 R23.1 90.47,42.52 v90,43
  Bottom 0.254: v90,43 89.34,42.34 83.66,42.34 78.84,47.17 72.49,47.17 B1.35
DI11  (via drill 0.35)
  Top 0.254: IC3.10 91.17,39.67 91.5,40 95,40 96,41 R24.1 94.47,42.52 v94,43
  Bottom 0.254: v94,43 85.67,51.33 71.68,51.33 67.26,55.76 67.26,57.48 B1.36
DI12  (via drill 0.35)
  Top 0.254: IC4.16 103.56,39.45 102.5,40.5 101,40.5 100,41.5 R29.1 98.47,42.52 v98,43
  Bottom 0.254: v98,43 97.34,42.34 92.66,42.34 86.56,48.44 73.76,48.44 B1.37
DI13  (via drill 0.35)
  Top 0.254: IC4.14 106.09,39.41 104,41.5 R30.1 102.47,42.52 v102,43
  Bottom 0.254: v102,43 92.67,52.33 73.22,52.33 69.7,55.86 69.7,57.58 B1.38
DI14  (via drill 0.35)
  Top 0.254: IC4.12 108.64,39.87 108,40.5 R31.1 106.47,42.52 v106,43
  Bottom 0.254: v106,43 105.34,42.34 99.69,42.34 90.15,51.88 72.86,51.88 B1.39
DI15  (via drill 0.35)
  Top 0.254: 112,42.5 112,41 111.17,40.17 IC4.10 | 112,42.5 R32.1 | v110,43 110.5,42.5 112,42.5
  Bottom 0.254: B1.40 72.34,57.48 72.34,54.51 73.85,53 94.25,53 103.5,43.75 109.25,43.75 v110,43
DIR
  Top 0.254: J2.4 J2.3 27.42,57.5 49.55,57.5 50.7,58.65 B1.24
DO0
  Top 0.254: B1.44 77.42,57.48 77.42,55.51 82.68,50.25 131.45,50.25 145.45,36.25 146.74,36.25 R33.1
DO1
  Top 0.254: B1.45 76.1,55.76 82.11,49.75 128.85,49.75 145.69,32.91 R34.1
DO2
  Top 0.254: B1.42 74.88,57.48 74.88,55.51 81.14,49.25 125.45,49.25 145.22,29.48 R35.1
DO3
  Top 0.254: B1.43 73.31,56.01 80.57,48.75 123.15,48.75 145.85,26.05 R36.1
DO4
  Top 0.254: R41.1 146.82,50.38 143.91,53.29 83.65,53.29 81.18,55.76 B1.49
DO5
  Top 0.254: R42.1 146.82,46.95 147.69,47.81 147.69,51.07 144.45,54.31 83.95,54.31 82.45,55.81 82.45,57.53 B1.48
DO6
  Top 0.254: R43.1 146.82,43.52 138.06,52.28 83.44,52.28 79.96,55.76 79.96,57.48 B1.46
DO7
  Top 0.254: R44.1 146.82,40.09 135.65,51.26 83.14,51.26 78.64,55.76 B1.47
ENBL
  Top 0.254: J2.6 J2.5 25.04,54.8 46.7,54.8 B1.23
GND  (via drill 0.4)
  other vias: 125,105 130,100 125,95 130,90 125,85 65,25 70,25 75,25 80,25 67.5,30 72.5,30 77.5,30 65,35 70,35 75,35 80,35 62.5,30 62.5,40 67.5,40 72.5,40 77.5,40 12.5,77.5 12.5,82.5 12.5,87.5 17.5,85 22.5,87.5 22.5,82.5 22.5,77.5 17.5,80 32.5,87.5 42.5,87.5 32.5,82.5 42.5,82.5 32.5,77.5 42.5,77.5 27.5,80 27.5,85 37.5,85 37.5,80 15,165 25,165 35,165 130,157.5 135,152.5 130,147.5 135,142.5 130,137.5 130,130 182.5,142.5 190,147.5 182.5,155 145,106.5 145,91.5 150,93 148,100.5 147.5,76 150,69 145,67.5 115,42.5 117.5,35 117.5,27.5 120,31.5 100,36 95,36 47.5,36 40.5,36 44,38.5 5,40 27.5,52.5 37.5,52.5 145,5 145,12.5 150,10 155,5 160,10 165,5 170,10 175,5 180,10 185,5 170,17.5 170,22.5 170,27.5 170,32.5 170,37.5 170,42.5 170,48.5 44.88,165 54.88,165 64.88,165 74.88,165 84.88,165 94.88,165 104.88,165 4.88,20 14.88,20 14.88,10 14.88,30 4.88,30 14.88,40 24.88,40 24.88,30 130.1,110 160.1,110 175.1,110 185.1,110 180.1,105 175.1,100 185.1,100 190.1,105 175.1,70 185.1,70 145.1,60 155.1,60 160.1,40 160.1,35 54.88,120 64.88,120 74.88,120 84.88,120 59.88,110 69.88,110 79.88,110 59.88,130 69.88,130 79.88,130
  pour Top (rank 2): 0,164 0,6 arc90 6,0 194,0 arc90 200,6 200,164 arc90 194,170 6,170 arc90
  pour Bottom (rank 2, no thermals): 0,164 0,6 arc90 6,0 194,0 arc90 200,6 200,164 arc90 194,170 6,170 arc90
MISO
  Top 0.254: U2.7 140.11,71.14 139.47,71.78 JP1.4 | JP3.4 139.22,96.28 139.88,95.61 U3.7
  Bottom 0.254: B1.50 85.04,60.12 133.09,60.12 139.16,66.19 139.16,70.12 137.5,71.78 JP1.4 136.12,73 136.12,87.99 138.76,90.63 138.76,94.86 JP3.4
MS0-  (via drill 0.4)
  other vias: 28.5,127.4 28,124.3 30.7,124.3 25.1,124.3
  pour Top (no thermals): 26.5,127 10.5,127 10,126.5 10,124 10.5,123.5 31,123.5 31.5,124 31.5,128.75 31,129.25 28.75,129.25
  pour Bottom (no thermals): 24.8,123.5 33.9,123.5 34.4,124 34.4,130.5 33.9,131 24.8,131 24.3,130.5 24.3,124
MS1-  (via drill 0.4)
  other vias: 30.7,114.2 28,114.2 25.1,114.2 28.5,117.3
  pour Top (no thermals): 26.5,116.95 10.5,116.95 10,116.45 10,113.95 10.5,113.45 31,113.45 31.5,113.95 31.5,118.7 31,119.2 28.75,119.2
  pour Bottom (no thermals): 24.8,113.4 33.9,113.4 34.4,113.9 34.4,120.4 33.9,120.9 24.8,120.9 24.3,120.4 24.3,113.9
MS2-  (via drill 0.4)
  other vias: 25,104 27.9,104 30.6,104 28.4,107.1
  pour Top (no thermals): 26.5,106.75 10.5,106.75 10,106.25 10,103.75 10.5,103.25 31,103.25 31.5,103.75 31.5,108.5 31,109 28.75,109
  pour Bottom (no thermals): 24.7,103.2 33.8,103.2 34.3,103.7 34.3,110.2 33.8,110.7 24.7,110.7 24.2,110.2 24.2,103.7
MS3-  (via drill 0.4)
  other vias: 25,93.8 27.9,93.8 30.6,93.8 28.4,96.9
  pour Top (no thermals): 26.7,96.45 10.5,96.45 10,95.95 10,93.45 10.5,92.95 31,92.95 31.5,93.45 31.5,98.2 31,98.7 28.95,98.7
  pour Bottom (no thermals): 24.7,93 33.8,93 34.3,93.5 34.3,100 33.8,100.5 24.7,100.5 24.2,100 24.2,93.5
N$1
  Top 0.254: IC1.1 29.55,29.45 30,29 R1.2
N$2
  Top 0.254: R2.2 34,28.5 32.09,30.41 IC1.3
N$3
  Top 0.254: R3.2 38,28.5 37,29.5 35.5,29.5 34.63,30.36 IC1.5
N$4
  Top 0.254: IC1.7 37.17,30.32 38,29.5 40.5,29.5 42,28 R4.2
N$5
  Top 0.254: R9.2 47.52,29 48.5,29 49.55,30.05 IC2.1
N$6
  Top 0.254: R10.2 50,28.5 51,29.5 51.5,29.5 52.09,30.09 IC2.3
N$7
  Top 0.254: R11.2 54,28.5 54.63,29.14 IC2.5
N$8
  Top 0.254: R12.2 58,29 57.17,29.82 IC2.7
N$9
  Top 0.254: IC3.1 83.56,29.95 84,29.5 R17.2
N$10
  Top 0.254: IC3.3 86.09,29.91 88,28 R18.2
N$11
  Top 0.254: IC3.5 88.64,30.36 90,29 91.5,29 92,28.5 R19.2
N$12
  Top 0.254: IC3.7 91.17,30.32 92,29.5 95,29.5 96,28.5 R20.2
N$13
  Top 0.254: R25.2 100,28.5 101.5,30 103,30 103.56,30.55 IC4.1
N$14
  Top 0.254: R26.2 104,28.5 106.09,30.59 IC4.3
N$15
  Top 0.254: R27.2 108,29 108.64,29.64 IC4.5
N$16
  Top 0.254: R28.2 112,29 111.17,29.82 IC4.7
N$17
  Top 0.254: R33.2 150.91,36.34 153.5,33.75 153.5,30 154.06,29.45 IC5.1
N$18
  Top 0.254: R34.2 150.78,32.91 152.75,30.93 152.75,27.88 153.72,26.91 IC5.3
N$19
  Top 0.254: R35.2 150.78,29.48 151.75,28.5 151.75,26.25 153.63,24.36 IC5.5
N$20
  Top 0.254: R36.2 150.45,26.05 152,24.5 152,22.75 152.93,21.82 IC5.7
N$21
  Top 0.254: R41.2 150.8,50.05 151.5,50.75 151.5,53.25 153.5,55.24 IC6.1
N$22
  Top 0.254: R42.2 150.78,46.62 152.25,48.1 152.25,51.25 153.71,52.7 IC6.3
N$23
  Top 0.254: IC6.5 153.66,50.16 153,49.5 153,47.83 152.09,46.92 152.09,45.51 R43.2
N$24
  Top 0.254: IC6.7 154.62,47.5 153.75,47.5 152.75,46.5 152.75,42.25 150.26,39.76 R44.2
N$25
  Top 0.254: IC5.15 160.47,28.18 160.15,28.5 160.15,29.89 161.25,30.99 161.25,33.25 163.5,35.5 164.45,35.5 R49.2
N$26
  Top 0.254: R50.2 162.91,28.67 162.91,28.29 162.19,27.57 160.37,27.57 160.15,27.35 160.15,25.96 160.47,25.64 IC5.13
N$27
  Top 0.254: IC5.11 162.09,23.09 163,24 163,25 163.14,25.14 R51.2
N$28
  Top 0.254: IC5.9 162.94,20.55 163.5,20 R52.2
N$29
  Top 0.254: IC6.15 162.47,53.98 163,54.5 163,55.5 163.5,56 R53.2
N$30
  Top 0.254: IC6.13 162.56,51.44 163.14,50.86 R54.2
N$31
  Top 0.254: IC6.11 162.1,48.9 163,48 163,46 163.29,45.71 R55.2
N$32
  Top 0.254: IC6.9 160.35,46.35 160,46 160,44 163.5,40.5 164.45,40.5 R56.2
N$35
  Top 0.254: U2.3 149.89,72.41 150.33,72.85 151.35,72.85 153.02,74.52 C2.1 L2.1
N$36
  Top 0.254: U3.3 149.38,96.89 150,97.5 151.75,97.5 153.22,98.97 C4.1 L4.1
N$37
  Top 0.254: U3.2 149.13,95.61 149.75,95 153.97,95 C4.2 L3.1
N$38
  Top 0.508: Q1.1 33.95,126.55 35.1,127.7 39.5,127.7 40.25,128.45 R60.2
N$39
  Top 0.254: U2.2 149.56,71.14 150.08,70.62 153.67,70.62 154.62,71.57 C2.2 L1.1
N$40
  Top 0.508: Q2.1 34.15,116.55 35.3,117.7 39.4,117.7 40.25,118.55 R62.2
N$41
  Top 0.508: Q3.1 33.85,106.55 35,107.7 39.8,107.7 40.5,108.4 R64.2
N$42
  Top 0.508: Q4.1 33.85,96.05 35,97.2 39.8,97.2 40.5,97.9 R66.2
N$43
  Top 0.508: R68.1 LED1.A
N$44
  Top 0.508: LED1.C 184.3,122.75 184.3,120.8 185.1,120 | 185.1,120 Q5.C | K1.4 183.62,120 185.1,120
N$45
  Top 0.508: R67.2 187.18,135.22 187.6,134.8 187.6,121.6 186.95,120.95 Q5.B
N$46
  Top 0.508: R70.1 LED2.A
N$47
  Top 0.254: R76.2 C6.1 R75.2 135.4,30.3 133.2,32.5 IC7.4
N$48
  Top 0.508: Q6.C 171.1,120 | 171.1,120 170.3,120.8 170.3,122.75 LED2.C | K2.4 169.62,120 171.1,120
N$49
  Top 0.508: R69.2 173.18,135.22 173.6,134.8 173.6,121.7 172.85,120.95 Q6.B
N$50
  Top 0.508: LED3.A R72.1
N$51
  Top 0.508: LED3.C 157.8,124.1 156.3,122.6 156.3,120.8 157.1,120 | Q7.C 157.1,120 | K3.4 155.62,120 157.1,120
N$52
  Top 0.508: R71.2 159.18,135.22 159.6,134.8 159.6,121.9 158.65,120.95 Q7.B
N$53
  Top 0.508: R74.1 LED4.A
N$54
  Top 0.508: Q8.C 143,120 | 143,120 142.3,120.7 142.3,122.75 LED4.C | K4.4 141.62,120 143,120
N$55
  Top 0.508: R73.2 145.18,135.22 145.6,134.8 145.6,121.8 144.75,120.95 Q8.B
N$56
  Top 0.254: R77.2 126.53,30 129.3,30 130.3,31 IC7.1
N$58
  Top 0.254: C5.2 129.1,34.92 129.1,32.55 128.54,32 IC7.8
N$59
  Top 0.254: R79.2 123.7,33.7 125.9,31.5 IC7.9
N$60
  Top 0.254: R78.2 125.42,31 IC7.10
PLC_COM1
  Top 0.254: J6.17 J6.18
  Top 1.016: J6.17 60.5,25.14 60.5,30.75 59.75,31.5
  pour Top: 60,30.5 60,33.75 59.75,34 28.25,34 28,33.75 28,30.75 28.25,30.5
PLC_COM2
  Top 0.254: J7.18 J7.17
  Top 1.016: J7.17 114,25.64 114,31 113.75,31.25
  pour Top: 113.75,34 82.25,34 82,33.75 82,30.75 82.25,30.5 114,30.5 114,33.75
PLC_DI0
  Top 0.254: J6.2 J6.1 30,23 R1.1
PLC_DI1
  Top 0.254: J6.4 J6.3 34,21.92 R2.1
PLC_DI2
  Top 0.254: J6.6 J6.5 38,20.84 R3.1
PLC_DI3
  Top 0.254: J6.8 J6.7 42,19.76 R4.1
PLC_DI4
  Top 0.254: J6.10 J6.9 46,19.32 R9.1
PLC_DI5
  Top 0.254: J6.12 J6.11 50,20.4 R10.1
PLC_DI6
  Top 0.254: J6.14 J6.13 54,21.48 R11.1
PLC_DI7
  Top 0.254: J6.16 J6.15 58,22.56 R12.1
PLC_DI8
  Top 0.254: J7.2 J7.1 84,23 R17.1
PLC_DI9
  Top 0.254: J7.4 J7.3 88,21.92 R18.1
PLC_DI10
  Top 0.254: J7.6 J7.5 92,20.84 R19.1
PLC_DI11
  Top 0.254: J7.8 J7.7 96,19.76 R20.1
PLC_DI12
  Top 0.254: J7.10 J7.9 100,19.32 R25.1
PLC_DI13
  Top 0.254: J7.12 J7.11 104,20.4 R26.1
PLC_DI14
  Top 0.254: J7.14 J7.13 108,21.48 R27.1
PLC_DI15
  Top 0.254: J7.16 J7.15 112,22.56 R28.1
PLC_DO0  (via drill 0.35)
  Top 0.254: J8.8 J8.7 | R37.1 169.93,35.43 v169.5,35 168.5,34 166.35,34 163.66,31.31 163.66,30.66 162.44,29.45 IC5.16
  Bottom 0.254: v169.5,35 172.26,32.24 J8.7
PLC_DO1  (via drill 0.35)
  Top 0.254: J8.6 J8.5 | R38.1 169.79,30.29 v169.5,30 168.5,29 165.5,29 163.41,26.91 IC5.14
  Bottom 0.254: v169.5,30 177.16,30 J8.5
PLC_DO2  (via drill 0.35)
  Top 0.254: J8.3 J8.4 | R39.1 171.38,25 v169.5,25 168.34,26.16 168.34,26.17 168.17,26.33 163.33,26.33 162.5,25.5 162.5,24.5 162.37,24.36 IC5.12
  Bottom 0.254: v169.5,25 177.08,25 J8.3
PLC_DO3  (via drill 0.35)
  Top 0.254: J8.1 J8.2 | R40.1 v169.5,20 168.5,20 168.34,20.16 168.34,21.02 167.53,21.82 IC5.10
  Bottom 0.254: v169.5,20 177,20 J8.1
PLC_DO4  (via drill 0.35)
  Top 0.254: J8.16 J8.15 | R45.1 v169.5,56 169.36,56 168.17,57.19 163.83,57.19 162.59,55.95 162.59,55.59 162.25,55.24 IC6.16
  Bottom 0.254: v169.5,56 176.56,56 J8.15
PLC_DO5  (via drill 0.35)
  Top 0.254: J8.14 J8.13 | R46.1 169.64,50.86 v169.5,51 167.79,52.7 IC6.14
  Bottom 0.254: v169.5,51 176.48,51 J8.13
PLC_DO6  (via drill 0.35)
  Top 0.254: J8.12 J8.11 | R47.1 169.79,45.71 v169.5,46 168,47.5 165,47.5 162.34,50.16 IC6.12
  Bottom 0.254: v169.5,46 176.4,46 J8.11
PLC_DO7  (via drill 0.35)
  Top 0.254: J8.10 J8.9 | R48.1 v169.5,40.57 168.07,42 165,42 162.5,44.5 162.5,47.5 162.38,47.62 IC6.10
  Bottom 0.254: v169.5,40.57 172.75,37.32 J8.9
PWM0
  Top 0.254: B1.0 73.5,61.4 92.22,61.4 93.38,62.56 94.39,62.56 95.54,61.4 U$1.P$18 U$1.P$2
PWM1
  Top 0.254: B1.1 50.78,91.82 77.6,65 93.28,65 93.38,65.1 94.39,65.1 94.58,64.9 U$1.P$19 U$1.P$3
PWM2
  Top 0.254: B1.2 52.04,94.36 78.8,67.6 93.34,67.6 93.38,67.64 110.94,67.64 U$1.P$20 U$1.P$4
PWM3
  Top 0.254: B1.3 65.5,96.9 89.68,72.72 94.39,72.72 95.2,71.9 U$1.P$21 U$1.P$5
PWM4
  Top 0.254: B1.4 67.76,99.44 91.9,75.3 111.6,75.3 U$1.P$22 U$1.P$6
PWM5
  Top 0.254: U$1.P$23 U$1.P$7
  Bottom 0.254: B1.5 65.32,101.98 92,75.3 108.1,75.3 U$1.P$23
PWM10
  Top 0.508: B1.10 44.25,114.83 44.25,98 42,95.75 40.73,95.75 R66.1 R65.2
PWM11
  Top 0.508: B1.11 44.49,118.74 43.5,117.75 43.5,107.75 41.77,106.03 R64.1 R63.2
PWM12
  Top 0.508: B1.12 44.28,121.28 42.75,119.75 42.75,117 41.77,116.03 R62.1 R61.2
PWM13
  Top 0.508: R59.2 R60.1 43.42,126.03 B1.13
SCK
  Top 0.254: U2.5 139.57,73.68 138.93,74.32 JP1.3 137.34,73.5 136.12,72.28 136.12,70.62 125.62,60.12 87.58,60.12 B1.52 | JP3.3 138.93,98.82 139.59,98.16 U3.5
  Bottom 0.254: JP1.3 137.34,75.13 138.56,76.35 138.56,79.9 137.34,81.12 137.34,88.17 139.36,90.19 139.36,96.68 137.34,98.7 JP3.3
SCL  (via drill 0.35)
  Top 0.254: v117.8,42.75 119.9,40.65 R78.1
  Bottom 0.254: B1.21 52.02,60.02 71.53,60.02 72.24,59.3 72.24,58.4 73.06,57.58 81.58,57.58 82.45,56.72 82.45,55.5 84.25,53.7 106.85,53.7 v117.8,42.75
SDA  (via drill 0.35)
  Top 0.254: v121.15,42.7 123.7,40.15 R79.1
  Bottom 0.254: B1.20 54.08,60.5 81.2,60.5 82.5,59.2 82.5,58.3 83.27,57.53 86.81,57.53 87.53,56.81 87.53,55.37 88.79,54.11 107.37,54.11 118.78,42.7 v121.15,42.7
STEP
  Top 0.254: B1.22 46.56,60.4 29.6,60.4 20.1,69.9 J2.1 J2.2
T1+
  Top 0.508: JP2.+ 151.14,80.5 155.09,80.5 L2.2 159.97,80.47 164.58,85.08 J5.3 J5.4
T1-
  Top 0.508: JP2.- 151.12,65.62 L1.2 157.87,65.62 172.25,80 J5.1 J5.2
T1_CS
  Top 0.254: U2.6 143.91,72.41 | 143.91,72.41 144,72.41 144,69.75 143.25,69 139.64,69 JP1.6 | 143.91,72.41 144.71,73.21 R57.1
  Bottom 0.254: B1.19 92.16,71.5 93.38,70.28 133.75,70.28 JP1.6
T2+
  Top 0.508: JP4.+ 150.65,104.4 151.08,104.83 L4.2 156.92,104.83 166.51,95.24 J5.7 J5.8
T2-
  Top 0.508: JP4.- 151.07,90.17 L3.2 159.92,90.17 161.75,92 178.16,92 J5.5 J5.6
T2_CS
  Top 0.254: U3.6 143.88,96.89 | 143.88,96.89 144.13,96.89 144.75,97.5 R58.1 | JP3.6 139.59,93.45 143.7,93.45 144,93.75 144,96.77 143.88,96.89
  Bottom 0.254: JP3.6 120.18,74.04 95.6,74.04 94.39,72.82 93.38,72.82 92.16,74.04 B1.18

## Text on the board
tPlace: DBT-SHIELD V2.0 | github.com/hiiragii/dbt-shield | 24V | 5V | 3.3V | A4 | A5 | A6 | A7 | A8 | A9 | D5 | D4 | D3 | D2 | D1 | D0 | GND
Measures: All units in inches